# Altium PCB PCB_HMI.PcbDoc
Units mil, origin at the board's own origin, x right, y up, seen from the top; angles counter-clockwise.
Board outline 8925 x 2710 mil, 2 copper layers (Top Layer, Bottom Layer); 65 components, 62 nets, 306 pads, 69 vias.
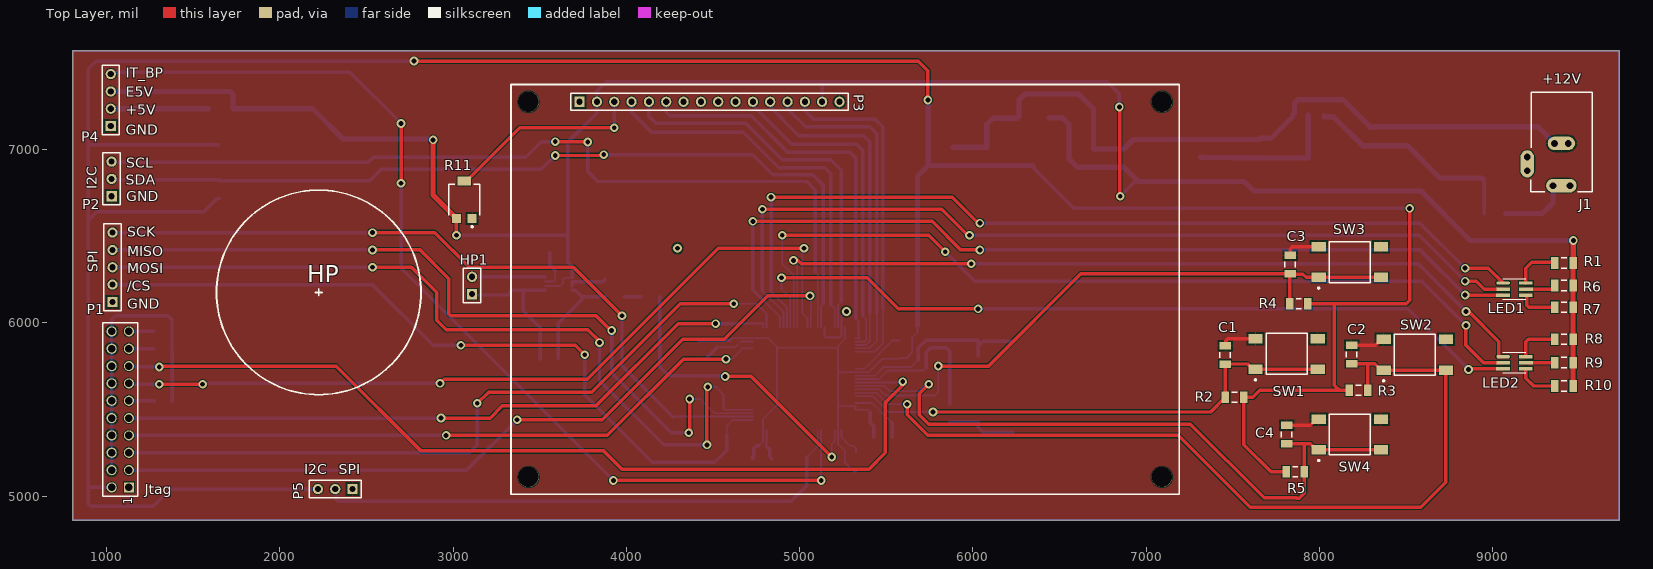
[diagram p0: Top Layer view]
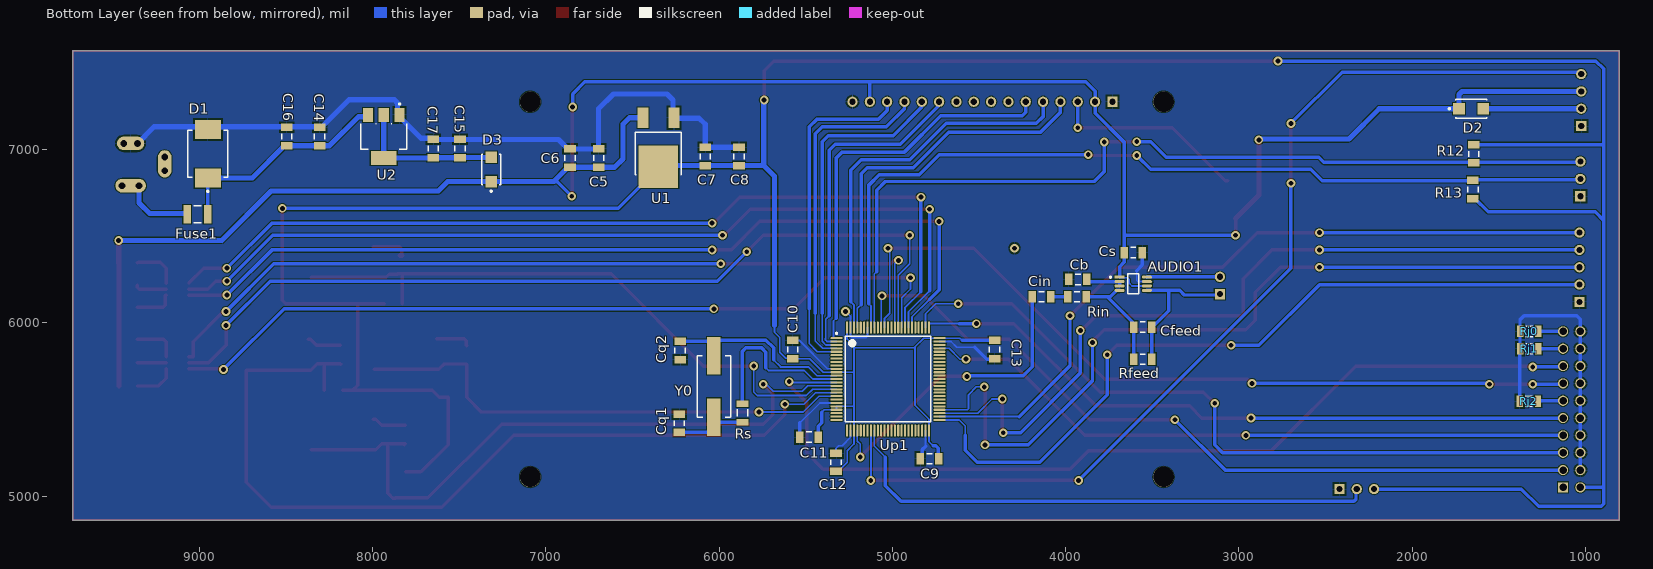
[diagram p1: Bottom Layer view, seen from below]

## Layer stack, top to bottom
Top Solder: solder mask 0.4, Solder Resist, Dk 3.5
Top Layer: signal copper 1.4
Dielectric 1: dielectric 12.6, FR-4, Dk 4.8
Bottom Layer: signal copper 1.4
Bottom Solder: solder mask 0.4, Solder Resist, Dk 3.5

## Board outline
805,4860 9730,4860 9730,7570 805,7570

## Design rules (kind name [scope] priority, off if disabled: settings)
Clearance [All] p1: gap=4.92 ignorepadtopadclearanceinfootprint=FALSE except(0: Arc-Hole Track-Hole SMDPad-Hole THPad-Hole Via-Hole Fill-Hole Poly-Hole Region-Hole Text-Hole)
DiffPairsRouting [All] p1: maxlimit=393.7 minlimit=4.92 mostfreqgap=5.91 toplayer_minwidth=15 toplayer_maxwidth=15 toplayer_prefwidth=15 bottomlayer_minwidth=15 bottomlayer_maxwidth=15 bottomlayer_prefwidth=15 maxuncoupledlength=500
FabricationTestPointUsage FabricationTestPointUsage_1 [All] p1: valid=0 allowmultiple=FALSE
FabricationTestpoint FabricationTestpoint_1 [All] p1: side=3 testpointundercomponent=TRUE minsize=40 maxsize=100 preferedsize=60 minholesize=0 maxholesize=40 preferedholesize=32 testpointgrid=1 allowsidetop=TRUE allowsidebottom=TRUE usegrid=TRUE gridtolerance=0.01
HoleSize [All] p1: absolutevalues=TRUE maxlimit=236.22 minlimit=7.87 maxpercent=80.000 minpercent=20.000
HoleSize FabricationTestpoint [All] p2 off: absolutevalues=TRUE maxlimit=100 minlimit=1 maxpercent=80.000 minpercent=20.000
HoleSize FabricationTestPointUsage [All] p3 off: absolutevalues=TRUE maxlimit=100 minlimit=1 maxpercent=80.000 minpercent=20.000
MinimumSolderMaskSliver [All] p1: minsoldermaskwidth=2.76
MinimumSolderMaskSliver SilkscreenOverComponentPads [All] p2: minsoldermaskwidth=10
PlaneClearance [All] p1: clearance=19.68
PlaneConnect [All] p1: planeconnectstyle=Relief reliefexpansion=15.75 reliefentries=4 reliefconductorwidth=5.91 reliefairgap=5.91
PolygonConnect [All] p1: connectstyle=Relief reliefconductorwidth=5.91 reliefentries=4 polygonreliefangle="90 Angle" airgapwidth=10
RoutingCorners [All] p1: cornerstyle=45-Degree minsetback=49.21 maxsetback=49.21
RoutingVias [All] p1: holewidth=11.81 width=23.62 viastyle="Through Hole" minholewidth=7.87 minwidth=17.72 maxholewidth=17.72 maxwidth=29.53
SolderMaskExpansion [All] p1: expansion=1.18
Width [All] p1: maxlimit=393.7 minlimit=4.92 preferedwidth=5.91
22 further rules are at their usual default settings.

## Components (designator, comment, footprint, x,y, rotation, side; value= is the part's Value field where it differs from the comment)
AUDIO1 "TS4990IST" FP-MiniSO-8-IPC_C 3610,6225 r180 bottom
C1 "Cap" c1206 7455,5815 r270 top value=10nF
C2 "Cap" c1206 8185,5816.85 r270 top value=10nF
C3 "Cap" c1206 7830,6335 r270 top value=10nF
C4 "Cap" c1206 7810,5355 r270 top value=10nF
C5 "Cap" c1206 6695,6950 r270 bottom value=100nF
C6 "Cap Pol2" c1206 6860,6950 r90 bottom value=1uF
C7 "Cap Pol2" c1206 6080,6960 r90 bottom value=1uF
C8 "Cap" c1206 5885,6960 r270 bottom value=100nF
C9 "Cap" c1206 4785,5215 r180 bottom value=100nF
C10 "Cap" c1206 5575,5845 r270 bottom value=100nF
C11 "Cap" c1206 5480,5340 r180 bottom value=100nF
C12 "Cap" c1206 5325,5195 r270 bottom value=100nF
C13 "Cap" c1206 4410,5845 r90 bottom value=100nF
C14 "Cap Pol2" c1206 8305,7075 r90 bottom value=1uF
C15 "Cap Pol2" c1206 7495,7005 r90 bottom value=1uF
C16 "Cap" c1206 8495,7075 r270 bottom value=100nF
C17 "Cap" c1206 7650,7005 r270 bottom value=100nF
Cb "Cap Pol2" c1206 3930,6250 r0 bottom value=1uF
Cfeed "Cap" c1206 3555,5975 r0 bottom value=150pF
Cin "Cap" c1206 4140,6150 r0 bottom value=1uF
Cq1 "Cap" c1206 6230,5420 r270 bottom value=30pF
Cq2 "Cap" c1206 6225,5840 r270 bottom value=30pF
Cs "Cap Pol2" c1206 3610,6405 r180 bottom value=2.2uF
D1 "MBRS540T3G" ONSC-SMC-2-403-03_V 8950,6975 r90 bottom
D2 "STPSL30A" FP-95400-MFG 1660,7235 r180 bottom value=10pF
D3 "STPSL30A" FP-95400-MFG 7315,6885 r90 bottom value=10pF
Fuse1 "MICROSMD050F-2 - 1210(3225)" CAPC1210(3225)280_N 9010,6625 r180 bottom value=2.2uF
HP1 "MHDR1X2" HDR1X2 3110,6165 r90 top
J1 "PWR2.5" KLD-0202 9395.63,7330.28 r270 top
Jtag "JTAG" HDR2X10 1130,5050 r90 top (schematic designator JTAG)
LED1 "rgb" RGB 9090,6195 r180 top
LED2 "rgb" RGB 9090,5770 r180 top
P1 "SPI" HDR1X5 1035,6120 r90 top
P2 "I2C" HDR1X3 1030,6730 r90 top
P3 "Header 16" HDR1X16 3730,7275 r0 top
P4 "Alim" HDR1X4 1025,7135 r90 top
P5 "Header 3" HDR1X3 2420,5040 r180 top
R1 "Res1" c1206 9410,6345 r180 top value=1K
R2 "Res1" c1206 7510,5570 r0 top value=10K
R3 "Res1" c1206 8225,5610 r180 top value=10K
R4 "Res1" c1206 7880,6110 r0 top value=10K
R5 "Res1" c1206 7860,5140 r180 top value=10K
R6 "Res1" c1206 9410,6215 r180 top value=3.3K
R7 "Res1" c1206 9410,6090 r180 top value=2.2K
R8 "Res1" c1206 9410,5905 r180 top value=1K
R9 "Res1" c1206 9410,5770 r180 top value=3.3K
R10 "Res1" c1206 9410,5635 r180 top value=2.2K
R11 "3314G-1-103E" BOUR-3314G-1_V 3065,6710 r180 top
R12 "Res1" c1206 1645,6975 r90 bottom value=10K
R13 "Res1" c1206 1650,6770 r90 bottom value=10K
Rfeed "Res3" c1206 3555,5790 r180 bottom value=82K
Rin "Res3" c1206 3935,6150 r180 bottom value=82K
Rj0 "10K" RESC1206(3216)_L 1325,5950 r180 bottom value="10000.00 Ohm"
Rj1 "10K" RESC1206(3216)_L 1325,5850 r0 bottom value="10000.00 Ohm"
Rj2 "10K" RESC1206(3216)_L 1327.5,5547.5 r0 bottom value="10000.00 Ohm"
Rs "" RESC1206(3216)_L 5865,5480 r90 bottom value="150 Ohm"
SW1 "4-1437565-1" TECO-4-1437565-1_V 7810,5820 r90 top
SW2 "4-1437565-1" TECO-4-1437565-1_V 8550,5815 r90 top
SW3 "4-1437565-1" TECO-4-1437565-1_V 8175,6350 r90 top
SW4 "4-1437565-1" TECO-4-1437565-1_V 8175,5355 r90 top
U1 "NCP1117DT33G" FP-369C-MFG 6350,7010 r0 bottom
U2 "NCP1117ST50T3G" FP-318H-MFG 7935,7075 r270 bottom
Up1 "STM32F107VCT6" LQFP100_N 5025,5675 r180 bottom
Y0 "25 Mhz" hc49 6030,5455.67 r270 bottom

## Footprints (in the part's own frame and the unit in brackets; to place one, negate y for a bottom-side part, rotate by r counter-clockwise, add the part's x,y. Pads: shape width x height; smd on the part's side, far side on the other; paste and mask are expansions set on the pad)
BOUR-3314G-1_V [mm] "SMD, 3-Leads, Body 4.5x4.5mm, Pitch 1.15mm"
  rect 1.3x1.3 smd: 1(-1.15,2.75) 3(1.15,2.75)
  rect 2x1.3 smd: 2(0,-2.75)
  silkscreen extent -2.25,-2.25 2.25,4.07, body extent -2.5,-3.1 2.5,3.1, height 2.73
c1206 [mm]
  rect 1.1x1.7 smd: 1(-1.35,0) 2(1.35,0)
  silkscreen extent -0.4,-0.75 0.4,0.75, body extent -1.7,-0.9 1.7,0.9, height 1.3
CAPC1210(3225)280_N [mm] "Chip Capacitor, Body 3.2x2.5mm, Height 2.8mm, IPC Medium Density"
  rect 1.15x2.7 smd: 1(-1.5,0) 2(1.5,0)
  silkscreen extent -0.55,-1.25 0.55,1.25, body extent -1.7,-1.4 1.7,1.4, height 2.8
FP-318H-MFG [mm]
  rect 2x1.5 smd paste+0 mask+0: 1(-3.15,2.3) 2(-3.15,0) 3(-3.15,-2.3)
  rect 2x3.8 smd paste+0 mask+0: 4(3.15,0)
  silkscreen extent -4.87,-3.35 1.85,3.35, body extent -1.85,-3.35 1.85,3.35, height 1.8
FP-369C-MFG [mm]
  rect 1.6x3 smd paste+0 mask+0: 1(-2.285,-4.39) 3(2.285,-4.39)
  rect 5.8x6.2 smd paste+0 mask+0: 4(0,2.79)
  silkscreen extent -3.36,-2.28 3.36,3.94, body extent -3.27,-4.92 3.27,4.99, height 2.51
FP-95400-MFG [mm]
  rect 1.7x1.68 smd paste+0 mask+0: 1(-1.79,0) 2(1.79,0)
  silkscreen extent -3.33,-1.4 2.25,1.4, body extent -2.55,-1.33 2.55,1.33, height 2.29
FP-MiniSO-8-IPC_C [mm]
  rect 1.454x0.433 smd paste+0 mask+0: 1(-2,0.975)
  rrect100% 1.454x0.433 smd paste+0 mask+0: 2(-2,0.325) 3(-2,-0.325) 4(-2,-0.975) 5(2,-0.975) 6(2,-0.325) 7(2,0.325) 8(2,0.975)
  silkscreen extent -3.45,-1.5 0.77,1.5, body extent -2.46,-1.5 2.46,1.5, height 1.1
hc49 [mm]
  rect 5.5x2 smd: 1(0,0) 2(-9,0)
  silkscreen extent -9,-2.45 0,2.45
HDR1X2 [mm] "Connector; Header; 2 Position"
  rect 1.5x1.5 hole 0.9: 1(0,0)
  round 1.5 hole 0.9: 2(2.54,0)
  silkscreen extent -1.27,-1.27 3.81,1.27
HDR1X3 [mm] "Connector; Header; 3 Position"
  rect 1.5x1.5 hole 0.9: 1(0,0)
  round 1.5 hole 0.9: 2(2.54,0) 3(5.08,0)
  silkscreen extent -1.27,-1.27 6.35,1.27
HDR1X4 [mm] "Connector; Header; 4 Position"
  rect 1.5x1.5 hole 0.9: 1(0,0)
  round 1.5 hole 0.9: 2(2.54,0) 3(5.08,0) 4(7.62,0)
  silkscreen extent -1.27,-1.27 8.89,1.27
HDR1X5 [mm] "Connector; Header; 5 Position"
  rect 1.5x1.5 hole 0.9: 1(0,0)
  round 1.5 hole 0.9: 2(2.54,0) 3(5.08,0) 4(7.62,0) 5(10.16,0)
  silkscreen extent -1.27,-1.27 11.43,1.27
HDR1X16 [mm] "Connector; Header; 16 Position"
  rect 1.5x1.5 hole 0.9: 1(0,0)
  round 1.5 hole 0.9: 2(2.54,0) 3(5.08,0) 4(7.62,0) 5(10.16,0) 6(12.7,0) 7(15.24,0) 8(17.78,0) 9(20.32,0) 10(22.86,0) 11(25.4,0) 12(27.94,0) 13(30.48,0) 14(33.02,0) 15(35.56,0) 16(38.1,0)
  silkscreen extent -1.27,-1.27 39.37,1.27
HDR2X10 [mm] "Connector; Header; 10x2 Position"
  rect 1.5x1.5 hole 1.1: 1(0,0)
  round 1.5 hole 1.1: 2(0,2.54) 3(2.54,0) 4(2.54,2.54) 5(5.08,0) 6(5.08,2.54) 7(7.62,0) 8(7.62,2.54) 9(10.16,0) 10(10.16,2.54) 11(12.7,0) 12(12.7,2.54) 13(15.24,0) 14(15.24,2.54) 15(17.78,0) 16(17.78,2.54) 17(20.32,0) 18(20.32,2.54) 19(22.86,0) 20(22.86,2.54)
  silkscreen extent -1.27,-1.27 24.13,3.81
KLD-0202 [mm] "DC Power Jack, 2.5mm, KLD Series, PCB Mount"
  oval 2x4.5 all layers, no hole: 1(13.7,0)
  round 1.5 hole 1: 1A(13.7,-1.25) 1B(13.7,1.25) 2A(7.5,-1) 2B(7.5,1) 3A(9.5,-5) 3B(11.5,-5)
  oval 2x4 all layers, no hole: 2(7.5,0)
  oval 4x2 all layers, no hole: 3(10.5,-5)
  silkscreen extent 0,-4.5 14.6,4.5
LQFP100_N [mm] "Thin QFP, 100-Leads, Body 14x14mm, Pitch 0.5mm, IPC Medium Density"
  oval 1.8x0.3 smd: 1(-7.55,6) 2(-7.55,5.5) 3(-7.55,5) 4(-7.55,4.5) 5(-7.55,4) 6(-7.55,3.5) 7(-7.55,3) 8(-7.55,2.5) 9(-7.55,2) 10(-7.55,1.5) 11(-7.55,1) 12(-7.55,0.5) 13(-7.55,0) 14(-7.55,-0.5) 15(-7.55,-1) 16(-7.55,-1.5) 17(-7.55,-2) 18(-7.55,-2.5) 19(-7.55,-3) 20(-7.55,-3.5) 21(-7.55,-4) 22(-7.55,-4.5) 23(-7.55,-5) 24(-7.55,-5.5) 25(-7.55,-6) 51(7.55,-6) 52(7.55,-5.5) 53(7.55,-5) 54(7.55,-4.5) 55(7.55,-4) 56(7.55,-3.5) 57(7.55,-3) 58(7.55,-2.5) 59(7.55,-2) 60(7.55,-1.5) 61(7.55,-1) 62(7.55,-0.5) 63(7.55,0) 64(7.55,0.5) 65(7.55,1) 66(7.55,1.5) 67(7.55,2) 68(7.55,2.5) 69(7.55,3) 70(7.55,3.5) 71(7.55,4) 72(7.55,4.5) 73(7.55,5) 74(7.55,5.5) 75(7.55,6)
  oval 0.3x1.8 smd: 26(-6,-7.55) 27(-5.5,-7.55) 28(-5,-7.55) 29(-4.5,-7.55) 30(-4,-7.55) 31(-3.5,-7.55) 32(-3,-7.55) 33(-2.5,-7.55) 34(-2,-7.55) 35(-1.5,-7.55) 36(-1,-7.55) 37(-0.5,-7.55) 38(0,-7.55) 39(0.5,-7.55) 40(1,-7.55) 41(1.5,-7.55) 42(2,-7.55) 43(2.5,-7.55) 44(3,-7.55) 45(3.5,-7.55) 46(4,-7.55) 47(4.5,-7.55) 48(5,-7.55) 49(5.5,-7.55) 50(6,-7.55) 76(6,7.55) 77(5.5,7.55) 78(5,7.55) 79(4.5,7.55) 80(4,7.55) 81(3.5,7.55) 82(3,7.55) 83(2.5,7.55) 84(2,7.55) 85(1.5,7.55) 86(1,7.55) 87(0.5,7.55) 88(0,7.55) 89(-0.5,7.55) 90(-1,7.55) 91(-1.5,7.55) 92(-2,7.55) 93(-2.5,7.55) 94(-3,7.55) 95(-3.5,7.55) 96(-4,7.55) 97(-4.5,7.55) 98(-5,7.55) 99(-5.5,7.55) 100(-6,7.55)
  silkscreen extent -7.68,-6.25 6.25,6.82, body extent -7,-7 7,7, height 1.6
ONSC-SMC-2-403-03_V [mil] "Molded, 2-Leads, Body 6.86x5.84mm"
  rect 110x150 smd: 1(-140.49,0) 2(140.49,0)
  silkscreen extent -222,-115 135,115, body extent -135,-115 135,115, height 99
RESC1206(3216)_L [mm] "Chip Resistor, Body 3.2x1.6mm, IPC High Density"
  rect 0.95x1.7 smd: 1(-1.35,0) 2(1.35,0)
  silkscreen extent -0.5,-0.75 0.5,0.75, body extent -1.67,-0.87 1.67,0.87, height 0.75
RGB [mm]
  round 0.5 on Top Overlay: 0(2.566,-0.911)
  oct 2x0.5 smd: 1(0.781,-0.872)
  rect 2x0.5 smd: 2(0.774,0.036) 3(0.787,0.912) 4(-2.559,0.906) 5(-2.566,0.017) 6(-2.554,-0.865)
  silkscreen extent -2.54,-1.52 0.86,1.52
TECO-4-1437565-1_V [mil] "SMD, 4-Leads, Body 6x6mm, Pitch 9.1mm"
  rect 55x83 smd: 1(-88.5,179.5) 2(-88.5,-179.5) 3(88.5,179.5) 4(88.5,-179.5)
  silkscreen extent -155,-118 118,185, body extent -118,-197 118,197, height 200

## Part data
AUDIO1: library part CMP-12130-000001-1, "IC AMP AUDIO PWR 1.2W MONO 8MSOP", Manufacturer=STMicroelectronics, Max Junction Temp=+150°C, Max Supply Voltage=5.5V, Min Supply Voltage=2.2V, Nominal Supply Current=3.1-3.7mA, Package=MiniSO-8, Power At Speaker R="1.2W @ 8O", Temperature="-40°C to +85°C", Temperature Range High=+85°C, Temperature Range Low=-40°C, Automotive=No, Category=IC, ComponentLink2Description=Datasheet, ComponentLink2URL=https://www.st.com/resource/en/datasheet/ts4990.pdf, Device Class L1="Integrated Circuits (ICs)", Device Class L2="Linear ICs", Device Class L3="Amplifiers - Audio", Digikey Description="IC AMP AUDIO PWR 1.2W MONO 8MSOP", Gain Bandwidth=1.5MHz, Height=1.1mm, Ipc Land Pattern Name=SOP65P490X110-8, Lead Free=Yes, Manufacturer Part Number=TS4990IST, Mouser Description="Audio Amplifiers 1.2W Audio Power Amp", Number Of Channels=1, Octopart=https://octopart.com/ts4990ist-stmicroelectronics-407881, RoHS=TRUE, Standoff Height=0mm
C1 C2 C3 C4 C5 C8 C9 C10 C11 C12 C13 C16 C17 Cfeed Cin Cq1 Cq2: "Capacitor", Published=8-Jun-2000, Publisher="Altium Limited"
  C1 C2 C3 C4 C5 C8 C9 C10 C11 C12 C13 C16 C17 Cq1 Cq2: LatestRevisionDate=17-Jul-2002, LatestRevisionNote="Re-released for DXP Platform.", PackageDescription="Radial Cap, Thru-Hole; 2 Leads; 0.3 in Pin Spacing", PackageReference=RAD-0.3
  Cfeed Cin: Revision="July-2002: Re-released for DXP Platform."
C6 C7 C14 C15 Cb Cs: "Polarized Capacitor (Axial)", LatestRevisionDate=17-Jul-2002, LatestRevisionNote="Re-released for DXP Platform.", Published=8-Jun-2000, Publisher="Altium Limited"
  C6 C7 C14 C15: PackageDescription="Polarized Capacitor; 2 Leads", PackageReference=POLAR0.8
D1: library part CMP-1055-00390-1, "Schottky Power Rectifier, 2-Pin SMC, Pb-Free, Tape and Reel", Manufacturer="On Semiconductor", ComponentLink1Description="Manufacturer URL", ComponentLink1URL=http://www.onsemi.com/, ComponentLink2Description=Datasheet, ComponentLink2URL=http://www.onsemi.cn/pub_link/Collateral/MBRS540T3-D.PDF, ComponentLink3Description="Package Specification", ComponentLink3URL=http://www.onsemi.com/pub_link/Collateral/403-03.PDF, Configuration=Single, DatasheetVersion="Rev. 8", IFSM Max (A)=190, Mounting Technology="Surface Mount", PackageDescription="2-Pin Small Molded Package, J-Bend Lead, Body 5.845 x 6.855 mm", PackageReference=SMC-2-403-03, PackageVersion="Rev. E, 08/2005", Packing="Tape and Reel", PartNumber=MBRS540T3G, RoHS=TRUE
D2 D3: library part CMP-02540-000045-1, "DIODE GEN PURP 100V 1A DO214AC", Capacitance=10pF, Forward Current=1A, Manufacturer=Vishay, Manufacturer Part Number=ES1B-E3/61T, Max Junction Temp=+150°C, Max Repetitive Reverse Voltage=100V, Max Surge Forward Current=30A, Package=95400, Peak Reverse Current=5uA, Temperature="-55°C to +150°C", Temperature Range Low=-55°C, Automotive=No, Category=Diode, ComponentLink2Description=Datasheet, ComponentLink2URL=http://www.vishay.com/docs/88586/es1.pdf, Device Class L1="Discrete Semiconductors", Device Class L2=Diodes, Device Class L3="Rectifier Diodes", Digikey Description="DIODE GEN PURP 100V 1A DO214AC", Footprint Url=https://www.vishay.com/docs/95400/sma.pdf, Height=2.29mm, Lead Free=Yes, Mouser Description="Diode Ultra Fast Recovery Rectifier 100V 1A 2-Pin DO-214AC T/R", Octopart=https://octopart.com/es1b-e3%2F61t-vishay-39550258, Reverse Voltage=100V, RoHS=TRUE, Standoff Height=0mm, Temperature Range High=+150°C
Fuse1: library part CMP-1038-02104-1, "MICROSMD050F-2 - 1210 (3225 Metric) Thickness 2.8mm SMD", Case-EIA=1210, Case-Metric=3225, Rated Voltage="100 V", Tolerance=±10%, Max Thickness="2.8 mm", Technology=SMT
HP1: "Header, 2-Pin", LatestRevisionDate=17-Jul-2002, LatestRevisionNote="Re-released for DXP Platform.", Publisher="Altium Limited"
J1: "Low Voltage Power Supply Connector", ComponentLink1Description="Manufacturer Link", ComponentLink1URL=http://domino.kycon.com/internet/Products.html, DatasheetDocument=09-May-2002, Published=17-Dec-2003, Publisher="Altium Limited"
Jtag: library part "Header 10X2", "Header, 10-Pin, Dual row", LatestRevisionDate=17-Jul-2002, LatestRevisionNote="Re-released for DXP Platform.", Publisher="Altium Limited"
P1: library part "Header 5", "Header, 5-Pin", LatestRevisionDate=17-Jul-2002, LatestRevisionNote="Re-released for DXP Platform.", Publisher="Altium Limited"
P2: library part "Header 3", "Header, 3-Pin", LatestRevisionDate=17-Jul-2002, LatestRevisionNote="Re-released for DXP Platform.", Publisher="Altium Limited"
P3: "Header, 16-Pin", LatestRevisionDate=17-Jul-2002, LatestRevisionNote="Re-released for DXP Platform.", Publisher="Altium Limited"
P4: library part "Header 4", "Header, 4-Pin", LatestRevisionDate=17-Jul-2002, LatestRevisionNote="Re-released for DXP Platform.", Publisher="Altium Limited"
P5: "Header, 3-Pin", LatestRevisionDate=17-Jul-2002, LatestRevisionNote="Re-released for DXP Platform.", Publisher="Altium Limited"
R1 R2 R3 R4 R5 R6 R7 R8 R9 R10 R12 R13 Rfeed Rin: "Resistor", Published=8-Jun-2000, Publisher="Altium Limited"
  R1 R2 R3 R4 R5 R6 R7 R8 R9 R10 R12 R13: LatestRevisionDate=17-Jul-2002, LatestRevisionNote="Re-released for DXP Platform.", PackageDescription="Axial Device, Thru-Hole; 2 Leads; 0.3 in Pin Spacing", PackageReference=AXIAL-0.3
  Rfeed Rin: Revision="July-2002: Re-released for DXP Platform."
R11: library part CMP-2000-05589-1, "4 mm Square Trimpot(R) Trimming Potentiometer, 5 KOhm, +/- 20%, 0.25 W, -55 to 125 degC, 3-Pin SMD, RoHS, Tape and Reel", Dielectric strength=500, Manufacturer=Bourns, Package=GullWing, Package Description="3-Pin Surface Mount Device, Body 4.5 x 4.5 mm, Pitch 1.15 mm", Package Reference=3314G-1, Power=250, Resistance=5, Temperature range=-55...+125°C, Tolerance=±20%, Angle of rotation=240°, Curve=linear, Datasheet URL=http://www.bourns.com/docs/Product-Datasheets/3314.pdf, Datasheet Version=05/2016, Manufacturer URL=http://www.bourns.com/, Mounting Technology=SurfaceMount
Rj0 Rj1 Rj2 Rs: library part CMP-1014-00623-1, "10K 0.25W 1% 1206 (3216 Metric)  SMD", Case-EIA=1206, Case-Metric=3216, Power="0.25 W", Tolerance="1 %", Technology=SMT
SW1 SW2 SW3 SW4: library part CMP-2000-05602-1, "Tactile Switch, 50 mA, 12 VDC, -20 to 85 degC, 4-Pin SMD, RoHS, Bulk", Actuator Color=N/A, Contact Rating @ Voltage=0.05@12VDCA, Dielectric strength=500VAC, Manufacturer=TEConnectivity/AMPBrand, Maximum Contact Resistance=100mOhm, Maximum DC Voltage Rating=12V, Minimum Insulation Resistance=100MOhm, Operating Force=1.57N, Operating Temperature=-20to85C, Package Description="4-Pin Surface Mount Device, Body 6 x 6 mm, Pitch 9.1 mm", Actuator Length=1.4mm, Actuator Style=RoundButton, Base Material=N/A, Body Orientation=Straight, Contact Material=CopperAlloy, Contact Plating=Silver, Datasheet URL=https://datasheet.ciiva.com/14635/0900766b80912216-14635826.pdf, Datasheet Version=04/2007, Dimension=6x10x5.25mm, Electrical Life=100000Cycle, Family=FSMJSMA, Ground Terminal=No, Housing Material=N/A, Illumination Type=N/R, Manufacturer URL=http://www.te.com/, Maximum AC Voltage Rating=N/A, Mechanical Life=N/A, Mounting=SurfaceMount,GullWing, Mounting Technology=SurfaceMount, Package Reference=4-1437565-1, Packaging=Bulk, Part No=4-1437565-1, Pole Throw Configuration=N/A, Product Weight=N/A, RoHS=Yes, Seal Description=N/A, Seal Location=N/A, Switch Configuration=N/A, Type=N/A
U1: library part CMP-07128-000008-1, "IC REG LINEAR 3.3V 1A DPAK", Ambient Temperature Range High=+125°C, Ambient Temperature Range Low=0°C, Dropout Voltage=1.2V, Manufacturer="ON Semiconductor", Max Junction Temp=+150°C, Max Supply Voltage=20V, Min Supply Voltage=2.4V, Nominal Supply Current=6mA, Output Current=1A, Output Voltage=3.3V, Package=369C, Temperature="-55°C to +150°C", Temperature Range Low=-55°C, Accuracy Percentage=1%, Automotive=No, Category=IC, ComponentLink2Description=Datasheet, ComponentLink2URL=https://www.onsemi.jp/PowerSolutions/document/NCP1117-D.PDF, Device Class L1="Integrated Circuits (ICs)", Device Class L2="Power Management ICs", Device Class L3="Voltage Regulators - Linear", Digikey Description="IC REG LINEAR 3.3V 1A DPAK", Footprint Url=https://www.onsemi.com/pub/Collateral/369C.PDF, Height=2.51mm, Lead Free=Yes, Manufacturer Part Number=NCP1117DT33G, Mouser Description="LDO Voltage Regulators 3.3V 1A Positive", Number Of Outputs=1, Octopart=https://octopart.com/ncp1117dt33g-on+semiconductor-1381653, Output Type=Fixed, RoHS=TRUE, Standoff Height=0mm, Temperature Range High=+150°C
U2: library part CMP-0592-00001-3, "IC REG LINEAR 5V 1A SOT223", Case/Package=SOT-223, Dropout Voltage=1.2V, Input Bias Current=6mA, Max Input Voltage=20V, Max Operating Temperature=125°C, Max Output Current=1A, Min Input Voltage=3.5V, Min Operating Temperature=0°C, Nominal Output Voltage=5V, Output Voltage Accuracy=1%, Package Quantity=1, Power Rating=781mW, Quiescent Current=10mA, Accuracy=1%, Contact Plating=Tin, Halogen Free="Halogen Free", Height=1.69mm, Lead Free="Lead Free", Length=6.7mm, Min Current Limit=1A, Number Of Outputs=1, Number of Pins=4, Number of Regulators=1, Output Current=1A, Output Type=Fixed, Output Voltage=5V, Packaging="Tape and Reel", Polarity=Positive, Radiation Hardening=No, REACH SVHC="No SVHC", Tolerance=1%, Width=3.7mm
Up1: library part CMP-0237-00081-1, "STM32 ARM-based 32-bit MCU Connectivity Line & Ethernet with 256 kB Flash, 64 kB Internal RAM, -40 to +85°C Temperature, 100-Pin LQFP, Tray", ComponentLink1Description="STM32F105/107 Datasheet", ComponentLink1URL=http://www.st.com/internet/com/TECHNICAL_RESOURCES/TECHNICAL_LITERATURE/DATASHEET/CD00220364.pdf, ComponentLink2Description="STM32 Family Web Page", ComponentLink2URL=www.st.com/stm32, ComponentLink3Description="st.com Home", ComponentLink3URL=http://www.st.com/internet/com/home/home.jsp, DatasheetVersion="rev5.0, May-2010", PackageDescription="100-Pin Low-Profile Quad Flat Pack, 14 x 14 mm Body, 0.5 mm Pitch (LQFP100)", PackageReference=LQFP100, PackageVersion="rev13, Apr-2011"
Y0: library part HC49/4H_SMX, "Surface Mount Quartz Crystal", PackageDocument=18-Oct-1999, ComponentLink1Description="Manufacturer Link", ComponentLink1URL=http://www.cmac.com/mt/, ComponentLink2Description=Datasheet, ComponentLink2URL=http://www.cmac.com/mt/databook/crystals/smd/hc49_4h_smx.pdf, DatasheetDocument=18-Oct-1999, Note="PCB layout complies with manufacturer's recommendation.", PackageReference=HC49/4H_SMX, Published=17-Jul-2002, Publisher="Altium Limited"

## Free pads (board coordinates)
  round 118.11 hole 118.11: 1(3435,5110) 1(3435,7275) 1(7090,7275) 2(7090,5110)

## Via types
v1: diameter 50, hole 28, Top Layer to Bottom Layer, 69 vias

## Nets (pads, with @x,y where several pads share a name; then routed paths per layer and width w, separated by ;. In a path a pad name is that pad's centre, name@x,y a point inside that pad or via, vN(x,y) a via of type N, cw(c..) or ccw(c..) an arc to the next point about the centre after c; other vN are vias at no path point)
3.3V: C7.1 C8.2 C9.2 C10.2 C11.2 C12.2 C13.2 Jtag.2 P5.3 R2.2 R3.2 R4.2 R5.2 R12.2 R13.1 U1.4 Up1.11 Up1.21 Up1.22 Up1.28 Up1.50 Up1.75 Up1.100 | length 21141
  Top Layer w20: v1(2775,7510) 5685,7510 5740,7455 v1(5740,7285) ; R5.2 7720,5140 7563.15,5296.85 R2.2 7615,5570 7655,5610 8115,5610 ; R4.2 8085,6110 ; R3.2 8115,5610 ; v1(8520,6660) 8520,6130 8500,6110 8085,6110 ; 8085,6110 8085,5640 8115,5610
  Bottom Layer w10: 4598.15,5898.15 4611.22,5911.22 Up1.75 4818.78,5911.22 4870,5860 ; 4765,5290 4788.78,5313.78 Up1.50 4788.78,5443.78 4870,5525 4870,5860 ; 5225,5517.52 Up1.21 Up1.22 5392.16,5497.84 5407.16,5482.84 ; Up1.100 5261.22,5906.22 5221.85,5866.85 5221.85,5855 ; C12.2 5313.15,5141.85 5260,5195 5260,5261.85 5221.85,5300 Up1.28 5221.85,5718.15 ; 5680,5985 5680,5945 5650,5915 5650,5830 5615,5795 5578.15,5795 C10.2 5476.85,5791.85 5399.37,5714.37 Up1.11 5225.63,5714.37 5221.85,5718.15 ; 4870,5860 4875,5855 5221.85,5855 ; 5221.85,5718.15 5221.85,5855
  Bottom Layer w20: Jtag.2 895,5050 ; R12.2 895,7028.15 ; R13.1 1638.19,6716.85 1561.34,6640 945,6640 895,6590 ; P5.3 1370,5040 1270,4940 910,4940 895,4955 895,5050 ; v1(2775,7510) 940,7510 895,7465 895,7028.15 ; C13.2@4415,5898.15 4598.15,5898.15 ; C9.2 4725,5221.85 4735,5231.85 4735,5275 4750,5290 4765,5290 ; 5407.16,5482.84 5407.16,5422.84 5426.54,5403.46 5426.54,5339.68 C11.2 ; U1.4 6350,6892.28 6582.28,6660 v1(8520,6660) ; 895,5050 895,6590 ; 895,6590 895,7028.15
  Bottom Layer w30: 5680,5985 5680,6845 5741.85,6906.85 ; v1(5740,7285) 5741.85,7283.15 5741.85,6906.85 ; U1.4 6343.31,6906.85 C7.1 C8.2 5741.85,6906.85
+5: AUDIO1.1 AUDIO1.6 C5.2 C6.1 Cs.1 D2.1 D3.1 P3.2 P3.15 P4.3 R1.1 R6.1 R7.1 R8.1 R9.1 R10.1 R11.3 U1.3 | length 12797.2
  Top Layer w20: R11.3 3019.72,6505.28 v1(3020,6505) ; v1(6845,7245) 6847.5,7242.5 6847.5,6732.5 v1(6850,6730)
  Top Layer w30: v1(2885,7055) 2885,6736.46 R11.3 ; R10.1 R9.1 R8.1 R7.1 R6.1 R1.1 9464.07,6345.93 9464.07,6472.22 v1@9463.15,6473.15
  Bottom Layer w10: AUDIO1.6 3616.89,6212.2 3635,6230.31 3635,6250 3645.13,6260.13 3685.5,6260.13 AUDIO1.1
  Bottom Layer w20: v1(3020,6505) 3663.15,6505 ; AUDIO1.1 3688.76,6324.13 3663.15,6349.74 Cs.1 3663.15,6505 ; P3.15 5130,7390 ; v1(6845,7245) 6845,7320 6775,7390 5130,7390 ; v1(6850,6730) 6934.53,6814.53 6954.13,6814.53 6954.54,6814.53 ; 3663.15,6505 3663.15,7043.15 3830,7210 P3.2 3830,7335 3885,7390 5130,7390
  Bottom Layer w30: P4.3 1712.9,7335 1730.47,7317.43 D2.1 2190,7235 2365,7060 2880,7060 v1(2885,7055) ; U1.3 6517.17,7182.83 6555,7145 6555,6945 6603.15,6896.85 C5.2 ; C5.2@6700,6896.85 C6.1 6871.81,6896.85 6954.13,6814.53 ; 6954.54,6814.53 D3.1 7565.47,6814.53 7620,6760 8585,6760 8870,6475 v1(9465,6475)
+12: C14.1 C16.2 D1.1 Fuse1.2 U2.3 | length 1294.4
  Bottom Layer w20: U2.3@8025.55,7189.17 U2.3 ; C16.2 C16.2@8506.81,7021.85 ; D1.1 8930,6834.51 8950.94,6813.56 Fuse1.2@8950.94,6630
  Bottom Layer w30: U2.3@8025.55,7189.17 8080.83,7189.17 8248.15,7021.85 C14.1 C16.2 ; C16.2@8506.81,7021.85 8694.15,6834.51 D1.1@8930,6834.51
BP0: C4.2 R5.1 SW4.1 SW4.2 Up1.15 | length 3939
  Top Layer w20: v1(5745,5645) 5690,5590 5690,5470 5745,5415 7255,5415 7680,4990 7865,4990 7866.72,4988.28 7883.28,4988.28 7913.15,5018.15 R5.1 7913.15,5298.7 7910,5301.85 ; C4.2@7816.85,5295 C4.2 7910,5301.85 ; SW4.2 SW4.1 7981.5,5266.5 7946.15,5301.85 7910,5301.85
  Bottom Layer w10: Up1.15 5322.59,5635.98 5489.02,5635.98 5520,5605 5688.05,5605 5728.05,5645 v1(5745,5645)
BP1: C3.2 R4.1 SW3.1 SW3.2 Up1.16 | length 3607.3
  Top Layer w20: v1(5800,5750) 6090,5750 6621.85,6281.85 C3.2 ; R4.1 7826.85,6278.7 C3.2 ; SW3.2 SW3.1 7922.36,6261.5 7903.86,6280 7858.28,6280 7856.43,6281.85 C3.2
  Bottom Layer w10: Up1.16 5460.41,5615.95 5496.35,5580 5780,5580 5800,5600 v1(5800,5750)
BP2: C2.2 R3.1 SW2.1 SW2.2 Up1.17 | length 5142.5
  Top Layer w20: v1(5620,5530) 5620,5470 5740,5350 7185,5350 7600,4935 8585,4935 8729.5,5079.5 SW2.2 SW2.1 8356.5,5726.5 8319.3,5763.7 8275,5763.7 ; C2.2@8181.85,5760.55 C2.2 8275,5763.7 ; R3.1 8278.15,5760.55 8275,5763.7
  Bottom Layer w10: Up1.17 5443.74,5596.26 5510,5530 v1(5620,5530)
BP3: C1.2 R2.1 SW1.1 SW1.2 Up1.18 | length 2947.4
  Top Layer w20: v1(5770,5485) 7371.85,5485 R2.1 7456.85,5760 C1.2 7586.15,5761.85 7616.5,5731.5 SW1.1 SW1.2
  Bottom Layer w10: Up1.18 5423.42,5576.58 5515,5485 v1(5770,5485)
DAC_OUT1: Cin.2 Up1.29 | length 1771
  Top Layer w20: v1(4570,5690) 4720,5690 v1(5185,5225)
  Bottom Layer w10: v1(5185,5225) 5185,5300 5202.17,5317.17 Up1.29
  Bottom Layer w20: Cin.2 4193.15,5746.85 4245,5695 4565,5695 v1(4570,5690)
DB0: P3.7
DB1: P3.8
DB2: P3.9
DB3: P3.10
DB4: P3.11 Up1.2 | length 1933
  Bottom Layer w10: Up1.2 5376.54,5891.54 5385.86,5900.86 5385.86,5909.14 5385,5910 5385,6020 5365,6040
  Bottom Layer w20: P3.11 4730,7255 4955,7030 5330,7030 5365,6995 5365,6040
DB5: P3.12 Up1.3 | length 1926.5
  Bottom Layer w10: Up1.3 5384.14,5871.85 5405,5892.71 5405,6050
  Bottom Layer w20: P3.12 4830,7245 4995,7080 5370,7080 5405,7045 5405,6055
DB6: P3.13 Up1.4 | length 1950.6
  Bottom Layer w10: Up1.4 5402.17,5852.17 5445,5895 5445,6055
  Bottom Layer w20: P3.13 4930,7235 5035,7130 5405,7130 5445,7090 5445,6055
DB7: P3.14 Up1.5 | length 1966.8
  Bottom Layer w10: Up1.5 5432.48,5832.48 5480,5880 5480,6080
  Bottom Layer w20: P3.14 5030,7225 5080,7175 5435,7175 5480,7130 5480,6080
E: P3.6 Up1.1 | length 2340.5
  Bottom Layer w10: Up1.1 5349.16,5911.22 5340,5920.39 5340,6010 5325,6025
  Bottom Layer w20: P3.6 4230,7215 4250,7195 4720,7195 4930,6985 5290,6985 5325,6950 5325,6025
GND: AUDIO1.7 C1.1 C2.1 C3.1 C4.1 C5.1 C6.2 C7.2 C8.1 C9.1 C10.1 C11.1 C12.1 C13.1 C14.2 C15.2 C16.1 C17.1 Cb.2 Cq1.1 Cq2.2 Cs.2 D1.2 J1.2 J1.2A J1.2B Jtag.4 Jtag.6 Jtag.8 Jtag.10 Jtag.12 Jtag.14 Jtag.16 Jtag.18 Jtag.20 P1.1 P2.1 P3.1 P3.16 P4.1 P5.1 R11.1 Rj0.1 Rj1.2 Rj2.2 SW1.3 SW1.4 SW2.3 SW2.4 SW3.3 SW3.4 SW4.3 SW4.4 U1.1 U2.1 Up1.10 Up1.19 Up1.20 Up1.27 Up1.49 Up1.74 Up1.94 Up1.99 | length 8701.5
  Top Layer w20: C1.1 7460,5873.15 7460,5896.78 7471.72,5908.5 SW1.3 ; C4.1 7946.15,5408.15 7981.5,5443.5 SW4.3 ; C3.1 7830,6425 7843.5,6438.5 SW3.3 ; C2.1 8323,5870 8356.5,5903.5 SW2.3
  Top Layer w30: C3.1 C3.1@7841.81,6388.15
  Bottom Layer w10: AUDIO1.7 3584.14,6237.8 3590,6243.65 3590,6300 ; 4523.46,5858.46 4628.46,5858.46 4661.54,5891.54 Up1.74 ; 4808.46,5286.54 Up1.49 ; Up1.94 5143.46,5971.9 5143.46,5922.4 5150.86,5915 5235,5915 5241.54,5921.54 Up1.99 5241.54,6036.54 v1(5270,6065) ; Up1.27 5241.54,5338.46 5290,5290 5310,5290 5325,5275 C12.1 ; Up1.20 5417.79,5537.21 5533.15,5421.85 ; Up1.10 5374.06,5734.06 5538.15,5898.15 C10.1
  Bottom Layer w20: Jtag.4 Jtag.6 Jtag.8 Jtag.10 Jtag.12 Jtag.14 Jtag.16 Jtag.18 Jtag.20 1030,6020 1050,6040 1355,6040 1378.15,6016.85 Rj0.1 Rj1.2 1379.4,5848.75 1379.4,5548.75 Rj2.2 ; Cs.2 3556.85,6333.15 3590,6300 ; C13.1@4415,5790 4455,5790 4523.46,5858.46 ; 4808.46,5286.54 4826.5,5268.5 4826.5,5226.65 C9.1 ; C11.1 5533.15,5421.85
  Bottom Layer w30: C8.1 C7.2 6080,7145 6115,7180 6257.2,7180 U1.1 6265,7187.8 6265,7285 6300,7320 6610,7320 6695,7235 C5.1 C6.2 6871.81,7003.15 6926.81,7058.15 C15.2 C17.1 7656.65,7064.8 7720.08,7064.8 7844.45,7189.17 U2.1 7855,7209.57 7855,7268.76 7872.57,7286.34 8135,7286.34 8293.19,7128.15 C14.2 ; C14.2@8310,7130.49 8495,7130.49 8950,7130.49 9260.77,7130.49 J1.2A
  other v1: 4295,6430
I2C1_SCL: P2.3 R12.1 Up1.92 | length 5138.7
  Top Layer w20: v1(3590,7045) 3591.25,7043.75 3776.25,7043.75 v1(3777.5,7042.5)
  Bottom Layer w10: 5090,6295 5103.74,6281.26 Up1.92
  Bottom Layer w20: P2.3@1020,6930 P2.3 ; P2.3@1030,6925 R12.1@1650,6925 ; R12.1@1645,6925 2510,6925 2540,6955 3420,6955 3510,7045 v1(3590,7045) ; v1(3777.5,7042.5) 3777.5,6872.5 3835,6815 5040,6815 5090,6765 5090,6295
I2C1_SDA: P2.2 R13.2 Up1.93 | length 5077.2
  Top Layer w20: v1(3590,6965) 3865,6965 v1(3870,6970)
  Bottom Layer w10: Up1.93 5123.43,6096.57 5135,6108.15
  Bottom Layer w20: P2.2@1020,6830 P2.2 ; P2.2@1030,6825 R13.2@1650,6825 ; R13.2@1650,6820 2520,6820 2585,6885 3510,6885 v1(3590,6965) ; v1(3870,6970) 4730,6970 4845,6855 5075,6855 5135,6795 5135,6108.15
I2C_/SPI: P5.2 Up1.34 | length 3161.9
  Bottom Layer w10: 5040,5225 5103.74,5288.74 Up1.34
  Bottom Layer w20: P5.2 2324.53,5035.47 2324.53,4981.72 2336.24,4970 4950,4970 5040,5060 5040,5225
IT_BP: P4.4 Up1.33 | length 5852.4
  Top Layer w20: v1(2700,6805) v1(2700,7150) ; v1(3925,5090) v1(5125,5090)
  Bottom Layer w10: v1@5123.43,5090 Up1.33
  Bottom Layer w20: P4.4@1025,7445 2405,7445 v1(2700,7150) ; v1(2700,6805) 2700,6315 v1(3925,5090)
LED1_B: LED1.1 Up1.83 | length 5220.2
  Top Layer w20: v1(4835,6725) 5880,6725 6030,6575 v1(6040,6575) ; v1(8840,6315) 8973.58,6315 LED1.1
  Bottom Layer w10: 4835,6179.9 4926.57,6088.33 Up1.83
  Bottom Layer w20: 4835,6179.9 v1(4835,6725) ; v1(6040,6575) 8580,6575 v1(8840,6315)
LED1_G: LED1.2 Up1.82 | length 5198.9
  Top Layer w20: v1(4785,6655) 5820,6655 5970,6505 v1(5980,6505) ; v1(8840,6240) 8905,6240 8951.4,6193.6 LED1.2
  Bottom Layer w10: 4785,6185 4906.89,6063.11 Up1.82
  Bottom Layer w20: 4785,6185 v1(4785,6655) ; v1(5980,6505) 8575,6505 v1(8840,6240)
LED1_R: LED1.3 Up1.81 | length 5180.5
  Top Layer w20: v1(4730,6585) 5765,6585 5930,6420 v1(6040,6420) ; v1(8840,6160) 8840.89,6159.11 LED1.3
  Bottom Layer w10: 4785,6135 4887.2,6032.8 Up1.81@4887.2,5975
  Bottom Layer w20: v1(4730,6585) 4730,6190 4785,6135 ; v1(6040,6420) 8580,6420 v1(8840,6160)
LED2_B: LED2.1 Up1.86 | length 4770.9
  Top Layer w20: v1(4965,6360) 4990,6360 5010,6340 v1(5990,6340) ; v1(8845,6065) 8860,6065 9034.78,5890.22 9034.78,5804.51 9034.94,5804.35 LED2.1
  Bottom Layer w10: v1(4965,6360) 4985.63,6339.37 Up1.86
  Bottom Layer w20: v1(5990,6340) 8570,6340 v1(8845,6065)
LED2_G: LED2.2 Up1.85 | length 5092
  Top Layer w20: v1(4900,6505) 5745,6505 v1(5840,6410) ; v1(8845,5985) 8845,5870 8946.4,5768.6 LED2.2
  Bottom Layer w10: v1(4900,6505) 4900,6340 4965.71,6274.29 4965.71,5972.48 Up1.85
  Bottom Layer w20: v1(5840,6410) 6010,6240 8590,6240 v1(8845,5985)
LED2_R: LED2.3 Up1.84 | length 4694.2
  Top Layer w20: v1(4895,6260) 5390,6260 5570,6080 v1(6030,6080) ; v1(8860,5730) 8864.11,5734.11 LED2.3
  Bottom Layer w10: v1(4895,6260) 4895,6195 4946.26,6143.74 Up1.84
  Bottom Layer w20: v1(6030,6080) 8510,6080 v1(8860,5730)
NetAUDIO1_2: AUDIO1.2 AUDIO1.3 Cb.1 | length 219.1
  Bottom Layer w20: AUDIO1.3 AUDIO1.2 3865.2,6237.8 3876.85,6249.45 Cb.1
NetAUDIO1_4: AUDIO1.4 Cfeed.2 Rfeed.1 Rin.2 | length 626.2
  Bottom Layer w20: Rfeed.1@3608.15,5795 Cfeed.2 3608.15,5998.15 3760,6150 ; AUDIO1.4 3705.91,6186.61 3742.53,6150 3760,6150 ; Rin.2 3760,6150
NetAUDIO1_5: AUDIO1.5 Cfeed.1 HP1.1 Rfeed.2 | length 872.3
  Bottom Layer w20: HP1.1 3115,6160 3315,6160 3341.61,6186.61 AUDIO1.5 ; 3404.92,6185 3404.92,6070.08 Cfeed.1@3500,5975 ; Cfeed.1@3499.35,5977.5 Cfeed.1 Rfeed.2
NetAUDIO1_8: AUDIO1.8 HP1.2 | length 421.9
  Bottom Layer w20: HP1.2 3110.81,6264.19 3530.44,6264.19 AUDIO1.8
NetC15_1: C15.1 C17.2 D3.2 U2.2 U2.4 | length 869.9
  Bottom Layer w30: D3.2 7316.81,6953.66 7493.19,6953.66 C15.1 C17.2 7650.43,6951.42 7934.57,6951.42 U2.4 U2.2
NetCin_1: Cin.1 Rin.1 | length 98.7
  Bottom Layer w20: Rin.1 Cin.1
NetCq1_2: Cq1.2 Rs.1 Y0.1 | length 407.3
  Bottom Layer w20: Rs.1 6029.09,5426.85 6030,5425.94 6030,5396.22 6059.37,5366.85 Cq1.2
NetCq2_1: Cq2.1 Up1.12 Y0.2 | length 1131
  Bottom Layer w10: Up1.12 5434.69,5694.69 5485,5745 5645,5745 5685,5785
  Bottom Layer w20: 5685,5785 5685,5855 5730,5900 6030,5900 Y0.2@6030,5863.78 ; Y0.2 Y0.2@6030,5863.78 ; Cq2.1 6059.37,5893.15 Y0.2@6030,5863.78
NetD2_2: D2.2 P4.2 | length 578.7
  Bottom Layer w20: D2.2@1579.53,7245 D2.2
  Bottom Layer w30: P4.2 1579.53,7235 D2.2
NetFuse1_1: Fuse1.1 J1.1 J1.1A J1.1B | length 445.6
  Bottom Layer w30: Fuse1.1@9075,6630 9285,6630 9346.42,6691.42 J1.1A J1.1
NetJ1_3: J1.3 J1.3A J1.3B
NetJTAG_11: Jtag.11 Rj2.1 | length 148.9
  Bottom Layer w20: Jtag.11 1271.85,5550 Rj2.1@1276.85,5545
NetJTAG_17: Jtag.17 Rj1.1 | length 145.4
  Bottom Layer w20: Jtag.17@1132.5,5847.5 Jtag.17 Rj1.1@1271.85,5850
NetJTAG_19: Jtag.19 Rj0.2 | length 141.8
  Bottom Layer w20: Jtag.19 Rj0.2
NetLED1_4: LED1.4 R7.2 | length 228.5
  Top Layer w20: LED1.4 9194.84,6159.35 9195,6159.19 9195,6101.72 9206.72,6090 R7.2
NetLED1_5: LED1.5 R6.2 | length 179.6
  Top Layer w20: LED1.5 9345.2,6194.35 9356.85,6206 R6.2
NetLED1_6: LED1.6 R1.2 | length 269.1
  Top Layer w20: LED1.6 9190.53,6315.53 9225,6350 9351.85,6350 R1.2
NetLED2_4: LED2.4 R10.2 | length 239.5
  Top Layer w20: LED2.4 9190.77,5679.23 9235,5635 R10.2
NetLED2_5: LED2.5 R9.2 | length 166.1
  Top Layer w20: LED2.5 9356.2,5769.35 R9.2
NetLED2_6: LED2.6 R8.2 | length 258.1
  Top Layer w20: LED2.6 9190.53,5889.47 9206.06,5905 R8.2
NetRs_2: Rs.2 Up1.13 | length 980.2
  Bottom Layer w10: Up1.13 5460,5675 5510,5725 5715,5725 5730,5740
  Bottom Layer w20: 5730,5740 5730,5830 5755,5855 5845,5855 5865,5835 Rs.2
NRST: Jtag.15 Up1.14 | length 5384
  Top Layer w20: v1@1300,5750 2325,5750 2815,5260 3870,5260 3975,5155 5400,5155 5495,5250 5495,5540 5595,5640 v1(5595,5660)
  Bottom Layer w10: Up1.14 5590.32,5655.32 v1(5595,5660)
  Bottom Layer w20: Jtag.15 1135,5745 v1(1305,5745)
PA13: Jtag.7 Up1.72 | length 3805.8
  Top Layer w20: v1(2960,5350) 3890,5350 4330,5790 v1(4575,5790)
  Bottom Layer w10: v1(4575,5790) 4610,5790 4672.17,5852.17 Up1.72
  Bottom Layer w20: Jtag.7 v1(2960,5350)
PA14: Jtag.9 Up1.76 | length 3906.8
  Top Layer w20: v1(2930,5450) 3215,5450 3285,5520 3825,5520 4300,5995 v1(4515,5995)
  Bottom Layer w10: 4615,5995 4787.94,5995 4788.78,5994.16 Up1.76
  Bottom Layer w20: Jtag.9 v1(2930,5450) ; v1(4515,5995) 4615,5995
PA15: Jtag.5 Up1.77 | length 4278.8
  Top Layer w20: v1(3140,5535) 3205,5600 3800,5600 4310,6110 v1(4620,6110)
  Bottom Layer w10: v1(4620,6110) 4750,6110 4808.46,6051.54 Up1.77
  Bottom Layer w20: Jtag.5 3095,5250 3140,5295 v1(3140,5535)
PB3: Jtag.13 Up1.89 | length 4699.5
  Top Layer w20: v1(1305,5645) v1(1555,5645) ; v1(2925,5650) 2950,5675 3775,5675 4530,6430 v1(5025,6430)
  Bottom Layer w10: v1(5025,6430) 5015,6420 5015,6055 5044.84,6025.16 5044.84,5972.4 Up1.89
  Bottom Layer w20: Jtag.13 1135,5645 v1(1305,5645) ; v1@1550,5650 v1(2925,5650)
PB4: Jtag.3 Up1.90 | length 4530.9
  Top Layer w20: v1(3370,5440) 3860,5440 4325,5905 4565,5905 4815,6155 v1(5060,6155)
  Bottom Layer w10: v1(5060,6155) 5064.37,6150.63 Up1.90
  Bottom Layer w20: Jtag.3 3080,5150 v1(3370,5440)
RS: P3.4 Up1.97 | length 2254
  Bottom Layer w10: 5180,6105 5202.17,6082.83 Up1.97
  Bottom Layer w20: P3.4 4030,7215 4145,7100 4675,7100 4880,6895 5145,6895 5180,6860 5180,6105
RW: P3.5 Up1.98 | length 2238.7
  Bottom Layer w10: Up1.98 5221.85,6103.15 5240,6121.3
  Bottom Layer w20: P3.5 4130,7190 4170,7150 4690,7150 4900,6940 5180,6940 5240,6880 5240,6121.3
SPI2_/CS: P1.2 Up1.51 | length 4434.3
  Top Layer w20: v1(3045,5870) 3705,5870 v1(3760,5815)
  Bottom Layer w10: 4580,5350 4580,5403.78 4615,5438.78 Up1.51
  Bottom Layer w20: P1.2 2535,6220 2885,5870 v1(3045,5870) ; v1(3760,5815) 3760,5585 4150,5195 4510,5195 4580,5265 4580,5350
SPI2_MISO: P1.4 Up1.53 | length 4618.3
  Top Layer w20: v1(2535,6420) 2810,6420 2975,6255 2975,6051.72 2986.72,6040 3825,6040 3910,5955 v1(3915,5955) ; v1(4360,5365) 4365,5370 v1(4365,5560)
  Bottom Layer w10: v1(4365,5560) 4425,5560 4506.85,5478.15 Up1.53
  Bottom Layer w20: P1.4 v1(2535,6420) ; v1(3915,5955) 3915,5710 4260,5365 v1(4360,5365)
SPI2_MOSI: P1.3 Up1.54 | length 4778.4
  Top Layer w20: v1(2535,6320) 2760,6320 2905,6175 2905,6015 2960,5960 3778.12,5960 3845,5893.12 v1(3845,5885) ; v1(4465,5295) 4465,5625 v1(4470,5630)
  Bottom Layer w10: v1(4470,5630) 4515,5630 4560,5585 4560,5505 4567.16,5497.84 Up1.54
  Bottom Layer w20: P1.3 v1(2535,6320) ; v1(3845,5885) 3845,5665 4215,5295 v1(4465,5295)
SPI2_SCK: P1.5 Up1.52 | length 4301.3
  Top Layer w20: v1(2535,6520) 2895,6520 3095,6320 3695,6320 v1(3975,6040)
  Bottom Layer w10: 4268.25,5458.47 Up1.52
  Bottom Layer w20: P1.5 v1(2535,6520) ; v1(3975,6040) 3975,5751.72 4268.25,5458.47
V0: P3.3 R11.2 | length 1142.1
  Top Layer w20: R11.2 3078.78,6818.27 3385.51,7125 v1(3930,7125)
  Bottom Layer w20: v1(3930,7125) P3.3
pads on no net: Jtag.1 LED1.0 LED2.0 Up1.6 Up1.7 Up1.8 Up1.9 Up1.23 Up1.24 Up1.25 Up1.26 Up1.30 Up1.31 Up1.32 Up1.35 Up1.36 Up1.37 Up1.38 Up1.39 Up1.40 Up1.41 Up1.42 Up1.43 Up1.44 Up1.45 Up1.46 Up1.47 Up1.48 Up1.55 Up1.56 Up1.57 Up1.58 Up1.59 Up1.60 Up1.61 Up1.62 Up1.63 Up1.64 Up1.65 Up1.66 Up1.67 Up1.68 Up1.69 Up1.70 Up1.71 Up1.73 Up1.78 Up1.79 Up1.80 Up1.87 Up1.88 Up1.91 Up1.95 Up1.96

## Polygon pours and split planes (outlines as drawn)
GND on Bottom Layer "Bottom Layer-GND" (solid, remove dead copper, pour order 0): 740,7680 745,7685 9875,7685 9875,4715 9850,4740 735,4740
GND on Top Layer "Top Layer-GND 1" (solid, remove dead copper, pour order 6): 538.7,7939.79 9988.7,7939.79 10053.7,7874.79 10003.7,7824.79 10003.7,4589.79 558.7,4589.79

## Keep-outs
Top Layer:
  the board outline again, w10
Bottom Layer:
  the board outline again, w10

## Silkscreen, mask and mechanical layers (free items; w line width, h text height)
Top Overlay:
  circle w10: c2225,6175 r590
  lines w10: 2205,6175 2245,6175 ; 2225,6155 2225,6195 ; 3335,5010 7190,5010 7190,7375 3335,7375 3335,5010
  text "IT_BP" at 1110,7415 h60
  text "+12V" at 9285,7380 h60
  text "E5V" at 1110,7305 h60
  text "+5V" at 1110,7200 h60
  text "GND" at 1110,7085 h60
  text "SCL" at 1115,6895 h60
  text "SDA" at 1110,6795 h60
  text "GND" at 1115,6700 h60
  text "SCK" at 1120,6495 h60
  text "MISO" at 1120,6385 h60
  text "MOSI" at 1120,6285 h60
  text "HP" at 2160,6235 h100
  text "/CS" at 1120,6185 h60
  text "GND" at 1120,6080 h60
  text "I2C" at 2140,5125 h60
  text "SPI" at 2340,5125 h60
Mechanical 15:
  the board outline again, w10

## Dimensions
9730,4845 to 9730,7570 on Mechanical 1
805,4860 to 9730,4860 on Mechanical 1

## Text inside footprints (layer, text, board x,y; h text height)
J1: Mechanical 1 "Alert PCB fab to slot details" at 9634.44,7319.02 h11.81 r270; Mechanical 1 "Assign keep-out area to slot" at 9654.13,7319.02 h11.81 r270; Mechanical 1 "Mech 1 - Slot cut-out" at 9614.76,7319.02 h11.81 r270; Mechanical 1 "Mech 2 - Clearance, move to internal plane if present" at 9595.07,7319.02 h11.81 r270
Jtag: Top Overlay "1" at 1150,4950 h50 r90